# Altium PCB PCB1.PcbDoc
Units mm, origin at the board's own origin, x right, y up, seen from the top; angles counter-clockwise.
Board outline 31.88 x 22.99 mm, 2 copper layers (Top Layer, Bottom Layer); 5 components, 7 nets, 30 pads, 0 vias.
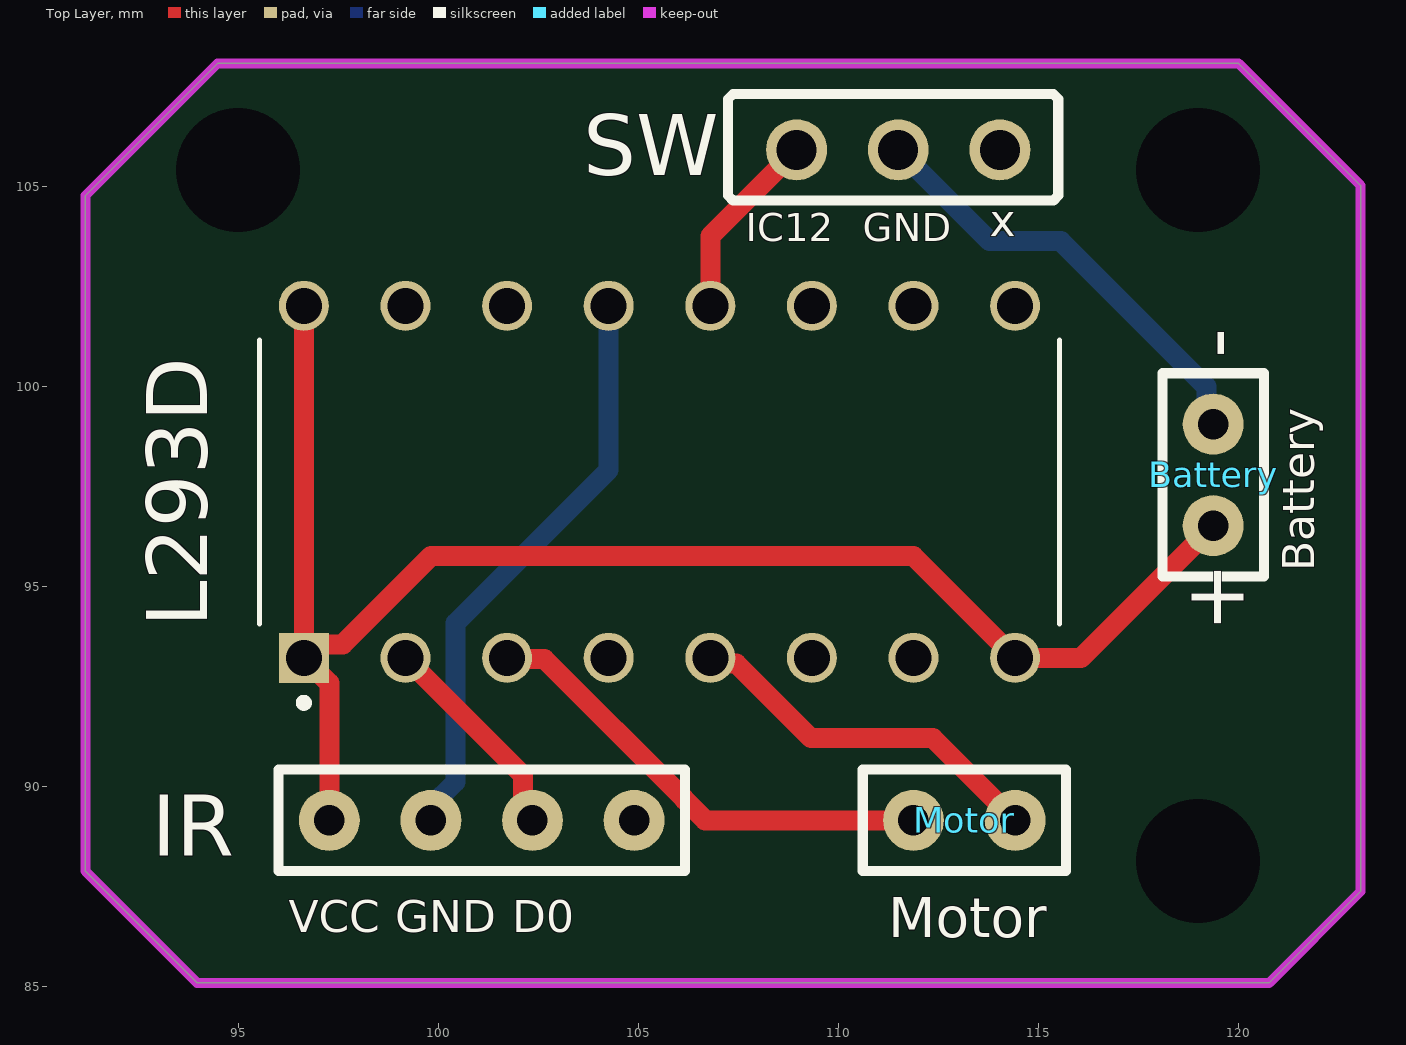
[diagram p0: Top Layer view]
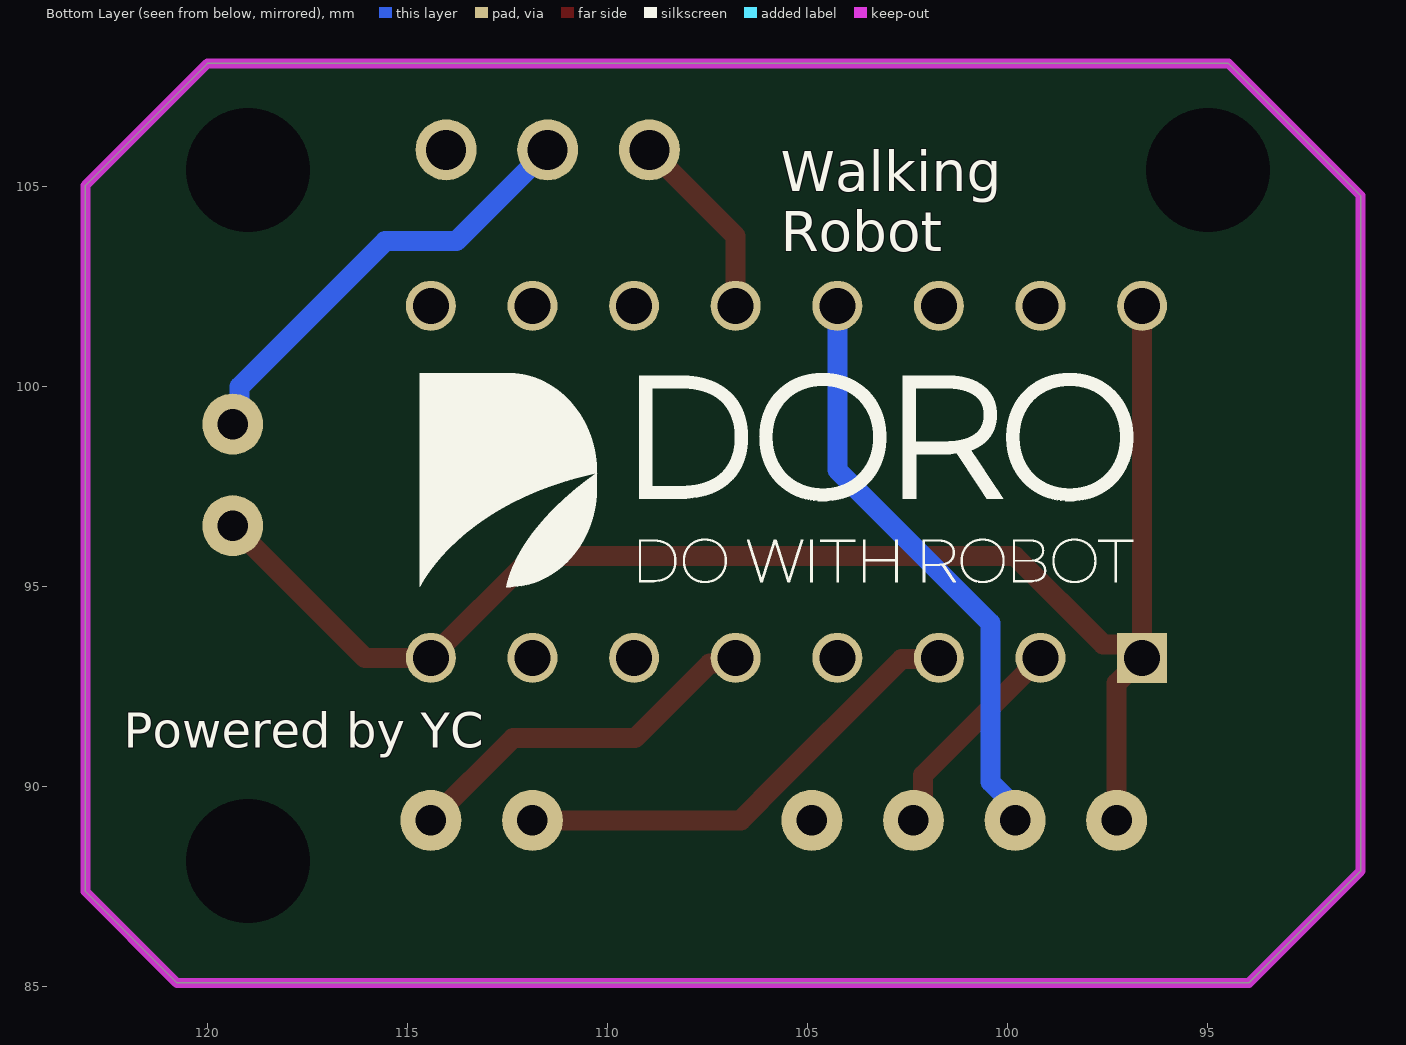
[diagram p1: Bottom Layer view, seen from below]
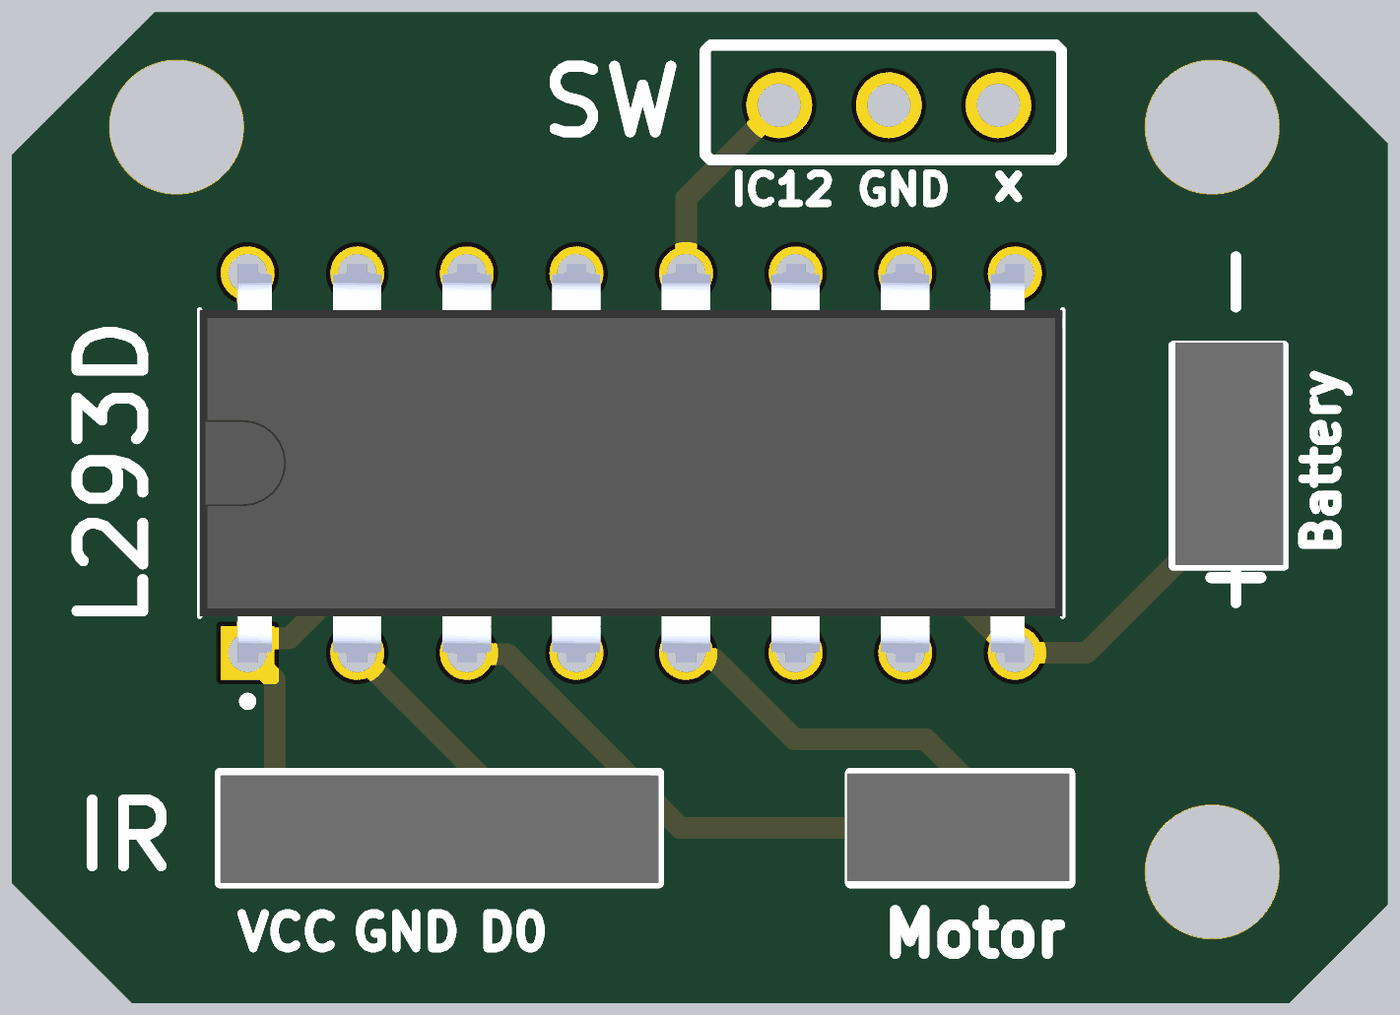
[diagram p2: 3D render of the assembled board from above, using the file's embedded part models]

## Layer stack, top to bottom
Top Solder: solder mask 0.0102, Solder Resist, Dk 3.5
Top Layer: signal copper 0.0356
Dielectric 1: dielectric 0.32, FR-4, Dk 4.8
Bottom Layer: signal copper 0.0356
Bottom Solder: solder mask 0.0102, Solder Resist, Dk 3.5

## Board outline
91.186,87.884 91.186,104.775 94.488,108.077 120.015,108.077 123.063,105.029 123.063,87.376 120.777,85.09 93.98,85.09

## Design rules (kind name [scope] priority, off if disabled: settings)
Clearance [All] p1: gap=0.254 ignorepadtopadclearanceinfootprint=FALSE except(0: Arc-Hole Track-Hole SMDPad-Hole THPad-Hole Via-Hole Fill-Hole Poly-Hole Region-Hole Text-Hole)
PolygonConnect [All] p1: connectstyle=Relief reliefconductorwidth=0.254 reliefentries=4 polygonreliefangle="90 Angle" airgapwidth=0.254
RoutingVias [All] p1: holewidth=0.711 width=1.27 viastyle="Through Hole" minholewidth=0.711 minwidth=1.27 maxholewidth=0.711 maxwidth=1.27
SolderMaskExpansion [All] p1: expansion=0.102 istentingtop=FALSE
Width [All] p1: maxlimit=0.254 minlimit=0.254 preferedwidth=0.254
30 further rules are at their usual default settings.

## Components (designator, comment, footprint, x,y, rotation, side; value= is the part's Value field where it differs from the comment)
Battery "DC" BATTERY 119.38,96.52 r90 top
IR "TCRT5000" IR 97.282,89.154 r0 top
L293D "L293D" DIP880W50P254L2000H510Q16 105.537,97.618 r90 top
Motor "MT" MOTOR 114.427,89.154 r180 top
SW "SW" SW 108.966,105.918 r0 top

## Footprints (in the part's own frame and the unit in brackets; to place one, negate y for a bottom-side part, rotate by r counter-clockwise, add the part's x,y. Pads: shape width x height; smd on the part's side, far side on the other; paste and mask are expansions set on the pad)
BATTERY [mil]
  round 60 hole 30: 0(0,0) 1(100,0)
  silkscreen extent -50,-50 150,50, body extent -50,-50 153,48, height 331
DIP880W50P254L2000H510Q16 [mm]
  rect 1.25x1.25 / inner round 1.25 / far side rect 1.25x1.25 hole 0.9: 1(-4.4,8.89)
  round 1.25 hole 0.9: 2(-4.4,6.35) 3(-4.4,3.81) 4(-4.4,1.27) 5(-4.4,-1.27) 6(-4.4,-3.81) 7(-4.4,-6.35) 8(-4.4,-8.89) 9(4.4,-8.89) 10(4.4,-6.35) 11(4.4,-3.81) 12(4.4,-1.27) 13(4.4,1.27) 14(4.4,3.81) 15(4.4,6.35) 16(4.4,8.89)
  silkscreen extent -5.62,-10 3.55,10, body extent -4.62,-10 4.62,10, height 5.1
IR [mil]
  round 60 hole 30: 0(0,0) 1(100,0) 2(200,0) 3(300,0)
  silkscreen extent -50,-50 350,50, body extent -50,-50 350,48, height 331
MOTOR [mil]
  round 60 hole 30: 0(0,0) 1(100,0)
  silkscreen extent -50,-50 150,50, body extent -50,-50 153,48, height 331
SW [mil]
  round 60 hole 39.37: 1(100,0) 2(200,0) 12(0,0)
  silkscreen extent -68,-50 258,55

## Part data
Battery: library part battery
L293D: "Bipolar Motor Driver - Parallel 16-PowerDIP", Package="DIP-16 STMicroelectronics", Availability="In Stock", Check_prices=https://www.snapeda.com/parts/L293D/STMicroelectronics/view-part/?ref=eda, MF=STMicroelectronics, MP=L293D, Price=None, Purchase-URL=https://pricing.snapeda.com/search/part/L293D/?ref=eda, SnapEDA_Link=https://www.snapeda.com/parts/L293D/STMicroelectronics/view-part/?ref=snap
Motor: library part motor

## Free pads (board coordinates)
  round 0 hole 3.1: 4(95,105.41) 5(119,105.41) 6(119,88.138)

## Nets (pads, with @x,y where several pads share a name; then routed paths per layer and width w, separated by ;. In a path a pad name is that pad's centre, name@x,y a point inside that pad or via, vN(x,y) a via of type N, cw(c..) or ccw(c..) an arc to the next point about the centre after c; other vN are vias at no path point)
NetBattery_0: Battery.0 IR.0 L293D.1 L293D.8 L293D.16 | length 39.3
  Top Layer w0.5: L293D.16 L293D.1 ; IR.0 97.282,92.583 L293D.1 ; Battery.0 116.078,93.218 L293D.8 111.887,95.758 99.822,95.758 97.62,93.556 96.985,93.556 L293D.1
NetBattery_1: Battery.1 SW.1 | length 11.2
  Bottom Layer w0.5: SW.1 113.792,103.632 115.57,103.632 119.207,99.995 119.207,99.233 Battery.1
NetIR_1: IR.1 L293D.13 | length 14.7
  Bottom Layer w0.5: IR.1 99.822,89.498 100.437,90.113 100.437,94.084 104.267,97.914 L293D.13
NetIR_2: IR.2 L293D.2 | length 5.4
  Top Layer w0.5: L293D.2 102.119,90.286 102.119,89.397 IR.2
NetL293D_3: L293D.3 Motor.1 | length 11.9
  Top Layer w0.5: L293D.3 101.755,93.19 102.656,93.19 106.168,89.678 106.168,89.666 106.68,89.154 Motor.1
NetL293D_5: L293D.5 Motor.0 | length 9.3
  Top Layer w0.5: L293D.5 106.951,93.074 107.459,93.074 109.321,91.212 112.369,91.212 Motor.0
NetL293D_12: L293D.12 SW.12 | length 4.8
  Top Layer w0.5: L293D.12 106.807,103.759 SW.12
pads on no net: IR.3 L293D.4 L293D.6 L293D.7 L293D.9 L293D.10 L293D.11 L293D.14 L293D.15 SW.2

## Keep-outs
Keep-Out Layer:
  lines w0.254: 91.186,87.884 91.186,103.124 91.186,104.775 94.488,108.077 120.015,108.077 123.063,105.029 123.063,87.376 120.777,85.09 93.98,85.09 91.186,87.884

## Silkscreen, mask and mechanical layers (free items; w line width, h text height)
Top Overlay:
  text "x" at 113.792,103.759 h0.8
  text "IC12" at 107.696,103.632 h0.7
  text "GND" at 110.617,103.632 h0.7
Bottom Overlay:
  drawing of 16 lines, arcs and shapes, not listed
  text "Walking  / Robot" at 105.679,103.378 h1
  text "Powered by YC" at 122.111,90.678 h1.5

## Text inside footprints (layer, text, board x,y; h text height)
Battery: Top Overlay "-" at 120.142,100.711 h1.52 r90; Top Overlay "+" at 120.142,93.853 h1.52 r90
IR: Top Overlay "D0" at 101.854,86.36 h0.8; Top Overlay "GND" at 98.933,86.36 h0.8; Top Overlay "VCC" at 96.266,86.36 h0.8